# Altium PCB PCB3.PcbDoc
Units mm, origin at the board's own origin, x right, y up, seen from the top; angles counter-clockwise.
Board outline 52.07 x 26.42 mm, 2 copper layers (Top Layer, Bottom Layer); 5 components, 4 nets, 16 pads, 0 vias.
Unrouted connection lines stored in the file: 1.
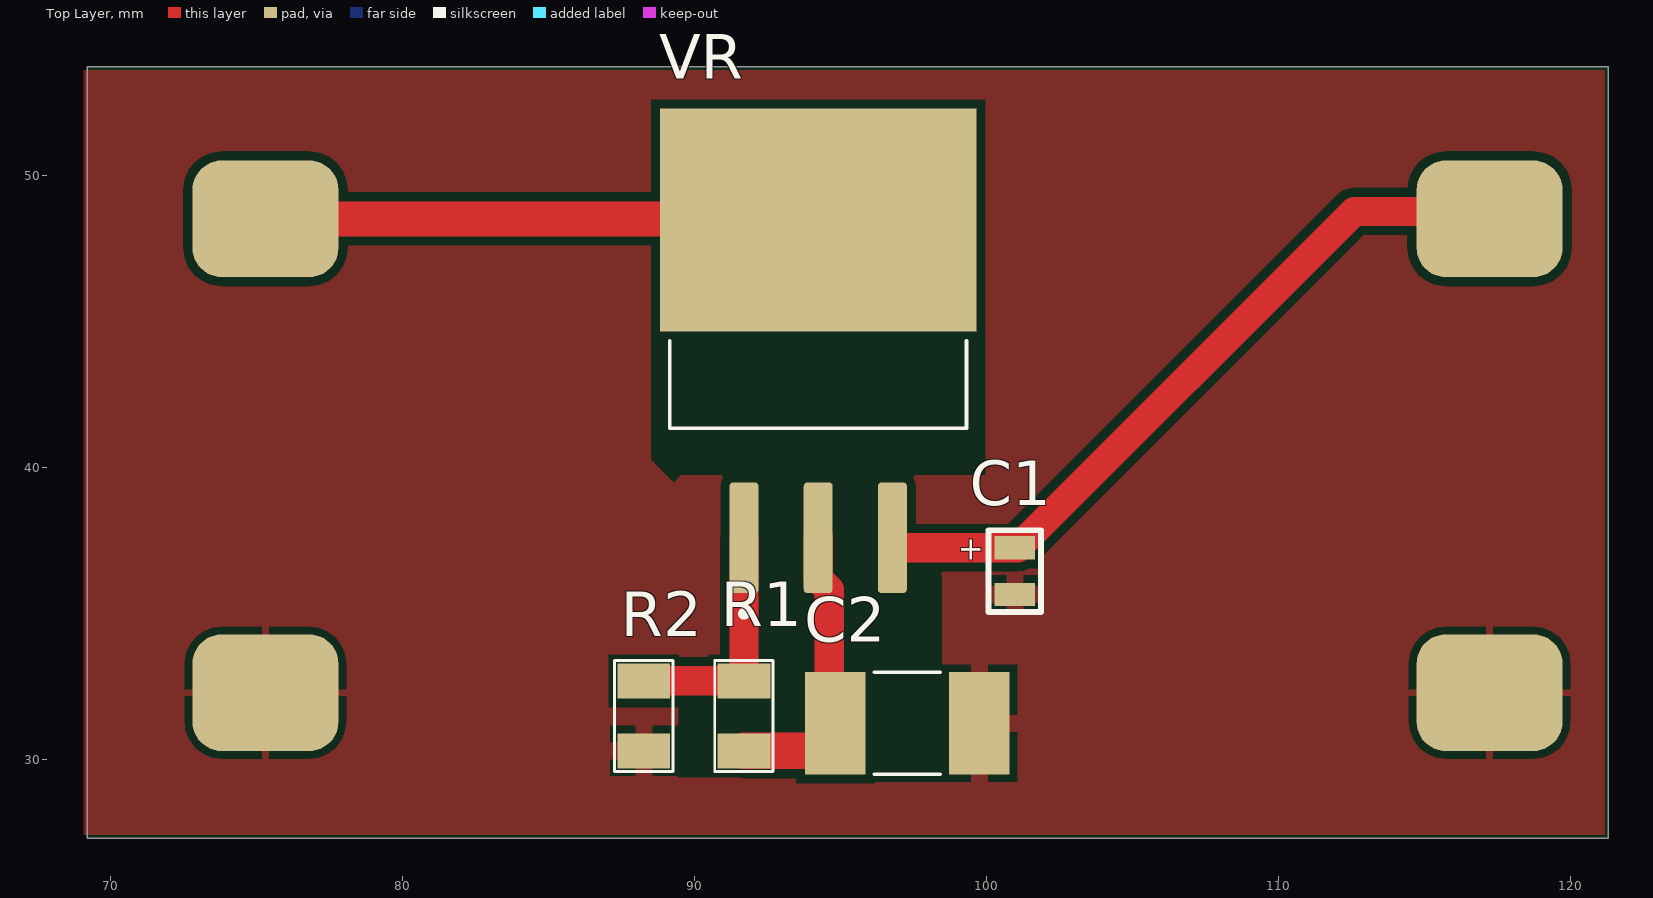
[diagram p0: Top Layer view]
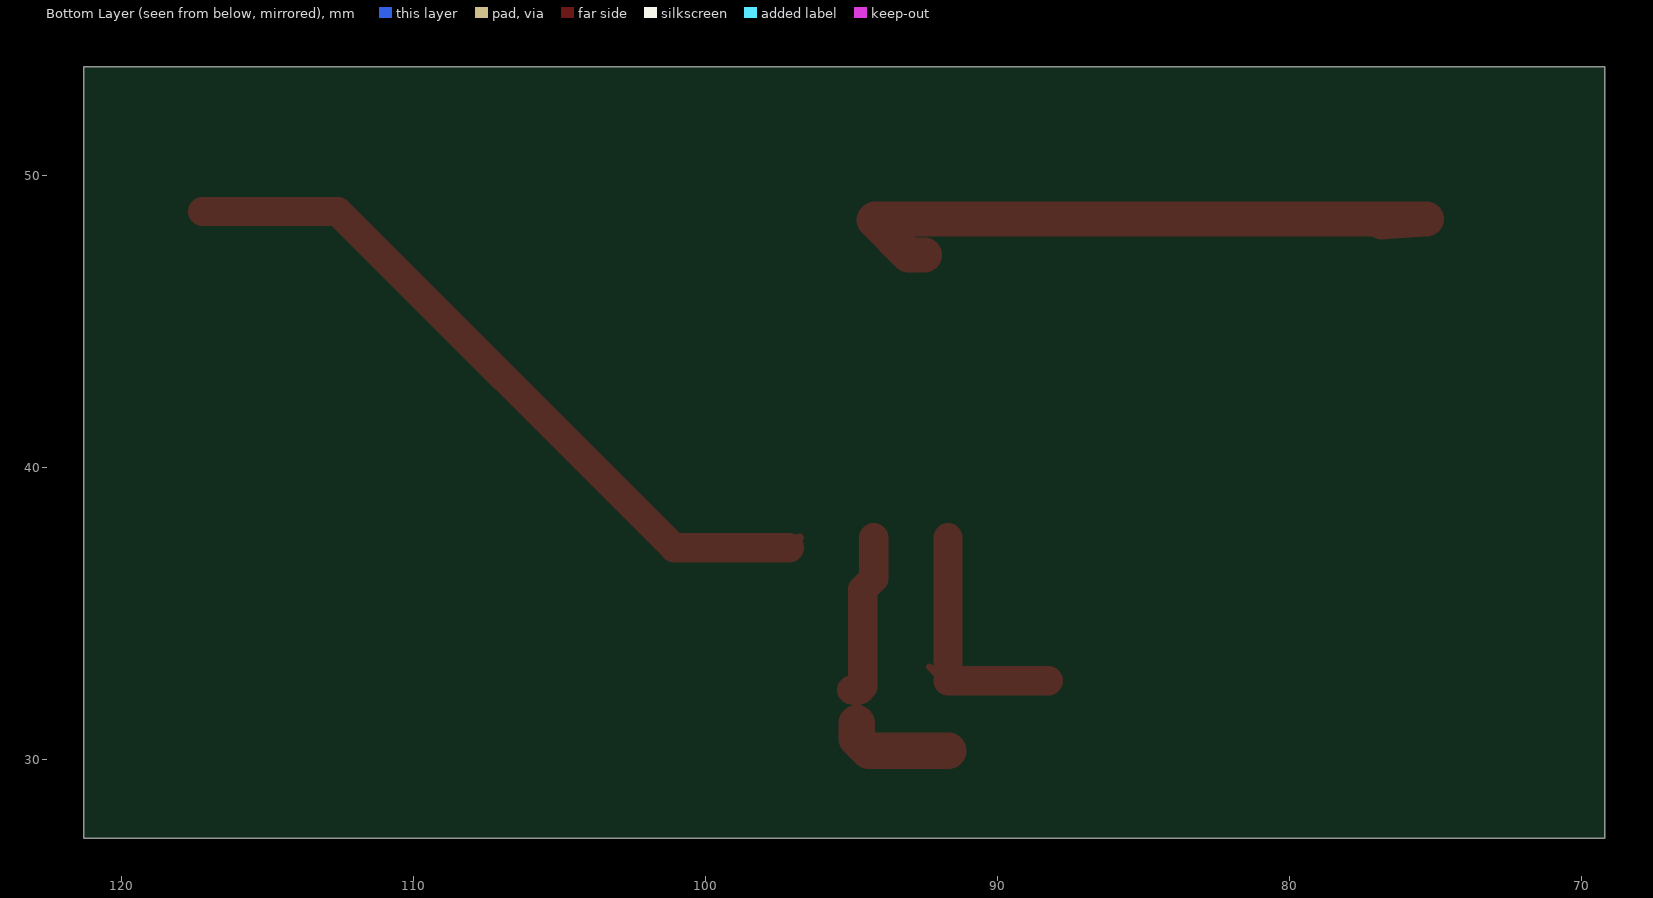
[diagram p1: Bottom Layer view, seen from below]
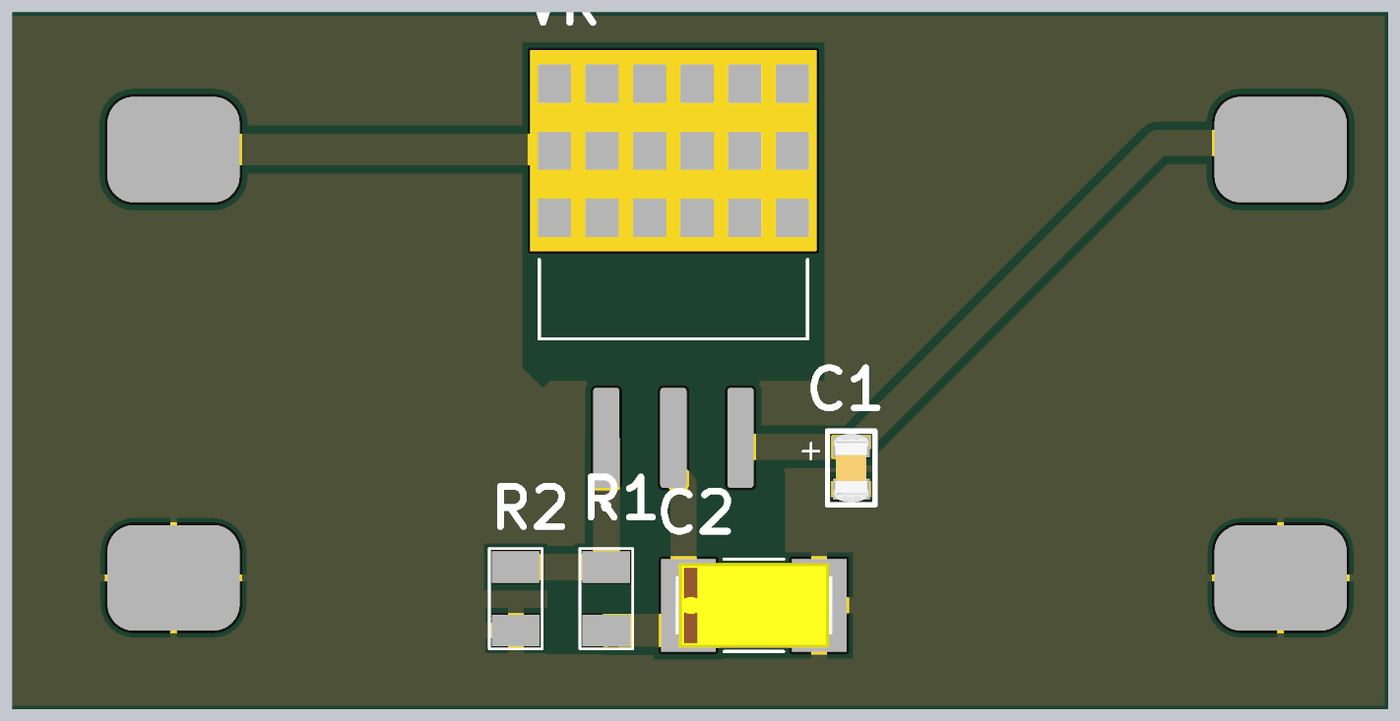
[diagram p2: 3D render of the assembled board from above, using the file's embedded part models]

## Layer stack, top to bottom
Top Solder: solder mask 0.0102, Solder Resist, Dk 3.5
Top Layer: signal copper 0.0356
Dielectric 1: dielectric 0.32, FR-4, Dk 4.8
Bottom Layer: signal copper 0.0356
Bottom Solder: solder mask 0.0102, Solder Resist, Dk 3.5

## Board outline
69.215,27.305 69.215,53.721 121.285,53.721 121.285,27.305

## Design rules (kind name [scope] priority, off if disabled: settings)
Clearance [All] p1: gap=0.3 ignorepadtopadclearanceinfootprint=FALSE
PolygonConnect [All] p1: connectstyle=Relief reliefconductorwidth=0.6 reliefentries=4 polygonreliefangle="90 Angle" airgapwidth=0.254
RoutingVias [All] p1: holewidth=0.711 width=1.27 viastyle="Through Hole" minholewidth=0.711 minwidth=1.27 maxholewidth=0.711 maxwidth=1.27
SolderMaskExpansion [All] p1: expansion=0.102 istentingtop=FALSE
Width [All] p1: maxlimit=2 minlimit=0.254 preferedwidth=0.254
30 further rules are at their usual default settings.

## Components (designator, comment, footprint, x,y, rotation, side; value= is the part's Value field where it differs from the comment)
C1 "CAP 100nF 0805" CAP_805 100.965,36.449 r270 top
C2 "T491C106K025AT" CAPPC6032X280N 97.282,31.242 r0 top
R1 "RES 1K 1206" RES_1206 91.694,31.496 r270 top
R2 "RES 1K 1206" RES_1206 88.265,31.496 r90 top
VR "LM1085IS-ADJ" TO254P1524X483-4N 94.234,43.992 r90 top

## Footprints (in the part's own frame and the unit in brackets; to place one, negate y for a bottom-side part, rotate by r counter-clockwise, add the part's x,y. Pads: shape width x height; smd on the part's side, far side on the other; paste and mask are expansions set on the pad)
CAP_805 [mm]
  rect 0.8x1.4 smd mask+0.05: 1(-0.8,0) 2(0.8,0)
  silkscreen extent -1.4,-0.9 1.4,0.9, body extent -1.3,-0.68 1.3,0.68, height 0.9
CAPPC6032X280N [mm]
  rect 2.07x3.51 smd: 1(-2.471,0) 2(2.471,0)
  silkscreen extent -1.12,-1.75 1.12,1.75, body extent -3,-1.6 3,1.6, height 2.8
RES_1206 [mm]
  rect 1.2x1.8 smd mask+0.05: 1(-1.2,0) 2(1.2,0)
  silkscreen extent -1.9,-1 1.9,1, body extent -1.57,-0.82 1.57,0.82, height 0.53
TO254P1524X483-4N [mm]
  rrect25% 3.79x0.99 smd: 1(-6.4,2.54) 2(-6.4,0) 3(-6.4,-2.54)
  rect 7.62x10.84 smd paste-6: 4(4.48,0)
  silkscreen extent -9.1,-5.08 0.35,5.08

## Part data
C1: "0805 smd"
C2: "10 ÂµF Molded Tantalum Capacitors 25 V 2312 (6032 Metric) 1.5Ohm", Package="SMD-2 KEMET", Availability="In Stock", Check_prices=https://www.snapeda.com/parts/T491C106K025AT/KEMET/view-part/?ref=eda, MF=KEMET, MP=T491C106K025AT, Price=None, Purchase-URL=https://pricing.snapeda.com/search/part/T491C106K025AT/?ref=eda, SnapEDA_Link=https://www.snapeda.com/parts/T491C106K025AT/KEMET/view-part/?ref=snap
VR: "3-A, 29-V, linear voltage regulator 3-DDPAK/TO-263", Package="TO-263-3 Texas Instruments", Arrow_Electronics-Purchase-URL=https://snapeda.com/shop?store=Arrow+Electronics&id=213969, Availability=Unavailable, DigiKey-Purchase-URL=https://snapeda.com/shop?store=DigiKey&id=213969, MF="Texas Instruments", Mouser-Purchase-URL=https://snapeda.com/shop?store=Mouser&id=213969, MP=LM1085IS-ADJ, Price=None, SnapEDA_Link=https://www.snapeda.com/parts/LM1085IS-ADJ/Texas%20Instruments/view-part/213969/?ref=snap

## Free pads (board coordinates)
  rrect50% 5x4 smd: 5(75.311,32.288) 5(75.311,48.514) 5(117.221,32.288) 5(117.221,48.514)

## Nets (pads, with @x,y where several pads share a name; then routed paths per layer and width w, separated by ;. In a path a pad name is that pad's centre, name@x,y a point inside that pad or via, vN(x,y) a via of type N, cw(c..) or ccw(c..) an arc to the next point about the centre after c; other vN are vias at no path point)
+3V3: C2.1 pad.5@75.311,48.514 R1.2 VR.2 VR.4 | length 34.7
  Top Layer w0.3: C2.1@93.926,29.915 C2.1@94.811,30.8 ; C2.1 94.811,32.2 C2.1@94.996,32.385
  Top Layer w1: VR.2 94.239,37.587 94.239,36.197 94.615,35.821 94.615,32.497 94.727,32.385 C2.1@94.996,32.385
  Top Layer w1.2: pad.5@76.842,48.404 76.811,48.404 75.311,48.514 94.192,48.514 VR.4 93.042,47.28 VR.4@92.502,47.28
  Top Layer w1.25: R1.2 94.401,30.296 94.811,30.706 94.811,30.8 C2.1
+12: C1.1 pad.5@117.221,48.514 VR.3 | length 25.4
  Top Layer w0.3: VR.3 VR.3@97.117,37.249
  Top Layer w1: VR.3@97.117,37.249 C1.1 101.065,37.249 112.584,48.768 pad.5@117.221,48.768
GND: C1.2 C2.2 pad.5@75.311,32.288 pad.5@117.221,32.288 R2.1
NetR1_1: R1.1 R2.2 VR.1 | length 8.9
  Top Layer w0.254: R1.1 91.856,32.696 R1.1@92.329,33.169
  Top Layer w1: R2.2 R1.1 ; R1.1@91.694,32.915 VR.1

## Polygon pours and split planes (outlines as drawn)
GND on Top Layer "GND_L01_P000" (solid, pour order 0): 69.088,53.594 121.158,53.594 121.158,27.432 120.015,27.432 118.237,27.432 69.088,27.432

## Other copper
Top Layer:
  pour cut-out: 94.742,39.751 95.123,39.37 95.123,36.301 95.504,35.92 95.504,33.782 95.377,33.655 95.758,33.274 95.885,33.274 95.885,29.448 96.146,29.187 96.192,29.233 98.464,29.233 98.464,36.283 98.298,36.449 98.171,36.322 97.282,36.322 97.282,35.918 97.544,35.655 97.322,35.433 96.249,35.433 96.237,35.422 96.012,35.647 96.012,38.608 95.885,38.735 96.009,38.859 96.009,39.751 95.504,39.751 95.377,39.878 95.25,39.751
  pour cut-out: 92.459,39.751 92.459,33.638 92.501,33.596 92.894,33.596 92.894,31.796 90.124,31.796 89.916,32.004 89.801,31.889 89.465,31.889 89.465,29.488 89.419,29.442 89.465,29.396 90.494,29.396 90.494,31.196 90.667,31.369 93.218,31.369 93.218,32.893 93.853,33.528 93.853,35.687 93.495,35.687 93.599,35.791 93.599,39.751 92.075,39.751
  pour cut-out: 88.514,44.362 88.514,40.264 89.281,39.497 89.535,39.751 99.949,39.751 99.949,44.357 99.954,44.362

## Silkscreen, mask and mechanical layers (free items; w line width, h text height)
Mechanical 1:
  the board outline again, w0.1

## Text inside footprints (layer, text, board x,y; h text height)
C1: Top Overlay "+" at 99.132,37.649 h0.8 r270